# Altium PCB PCB1.PcbDoc
Units mm, origin at the board's own origin, x right, y up, seen from the top; angles counter-clockwise.
Board outline 38 x 38 mm, 2 copper layers (Top Layer, Bottom Layer); 5 components, 6 nets, 25 pads, 0 vias.
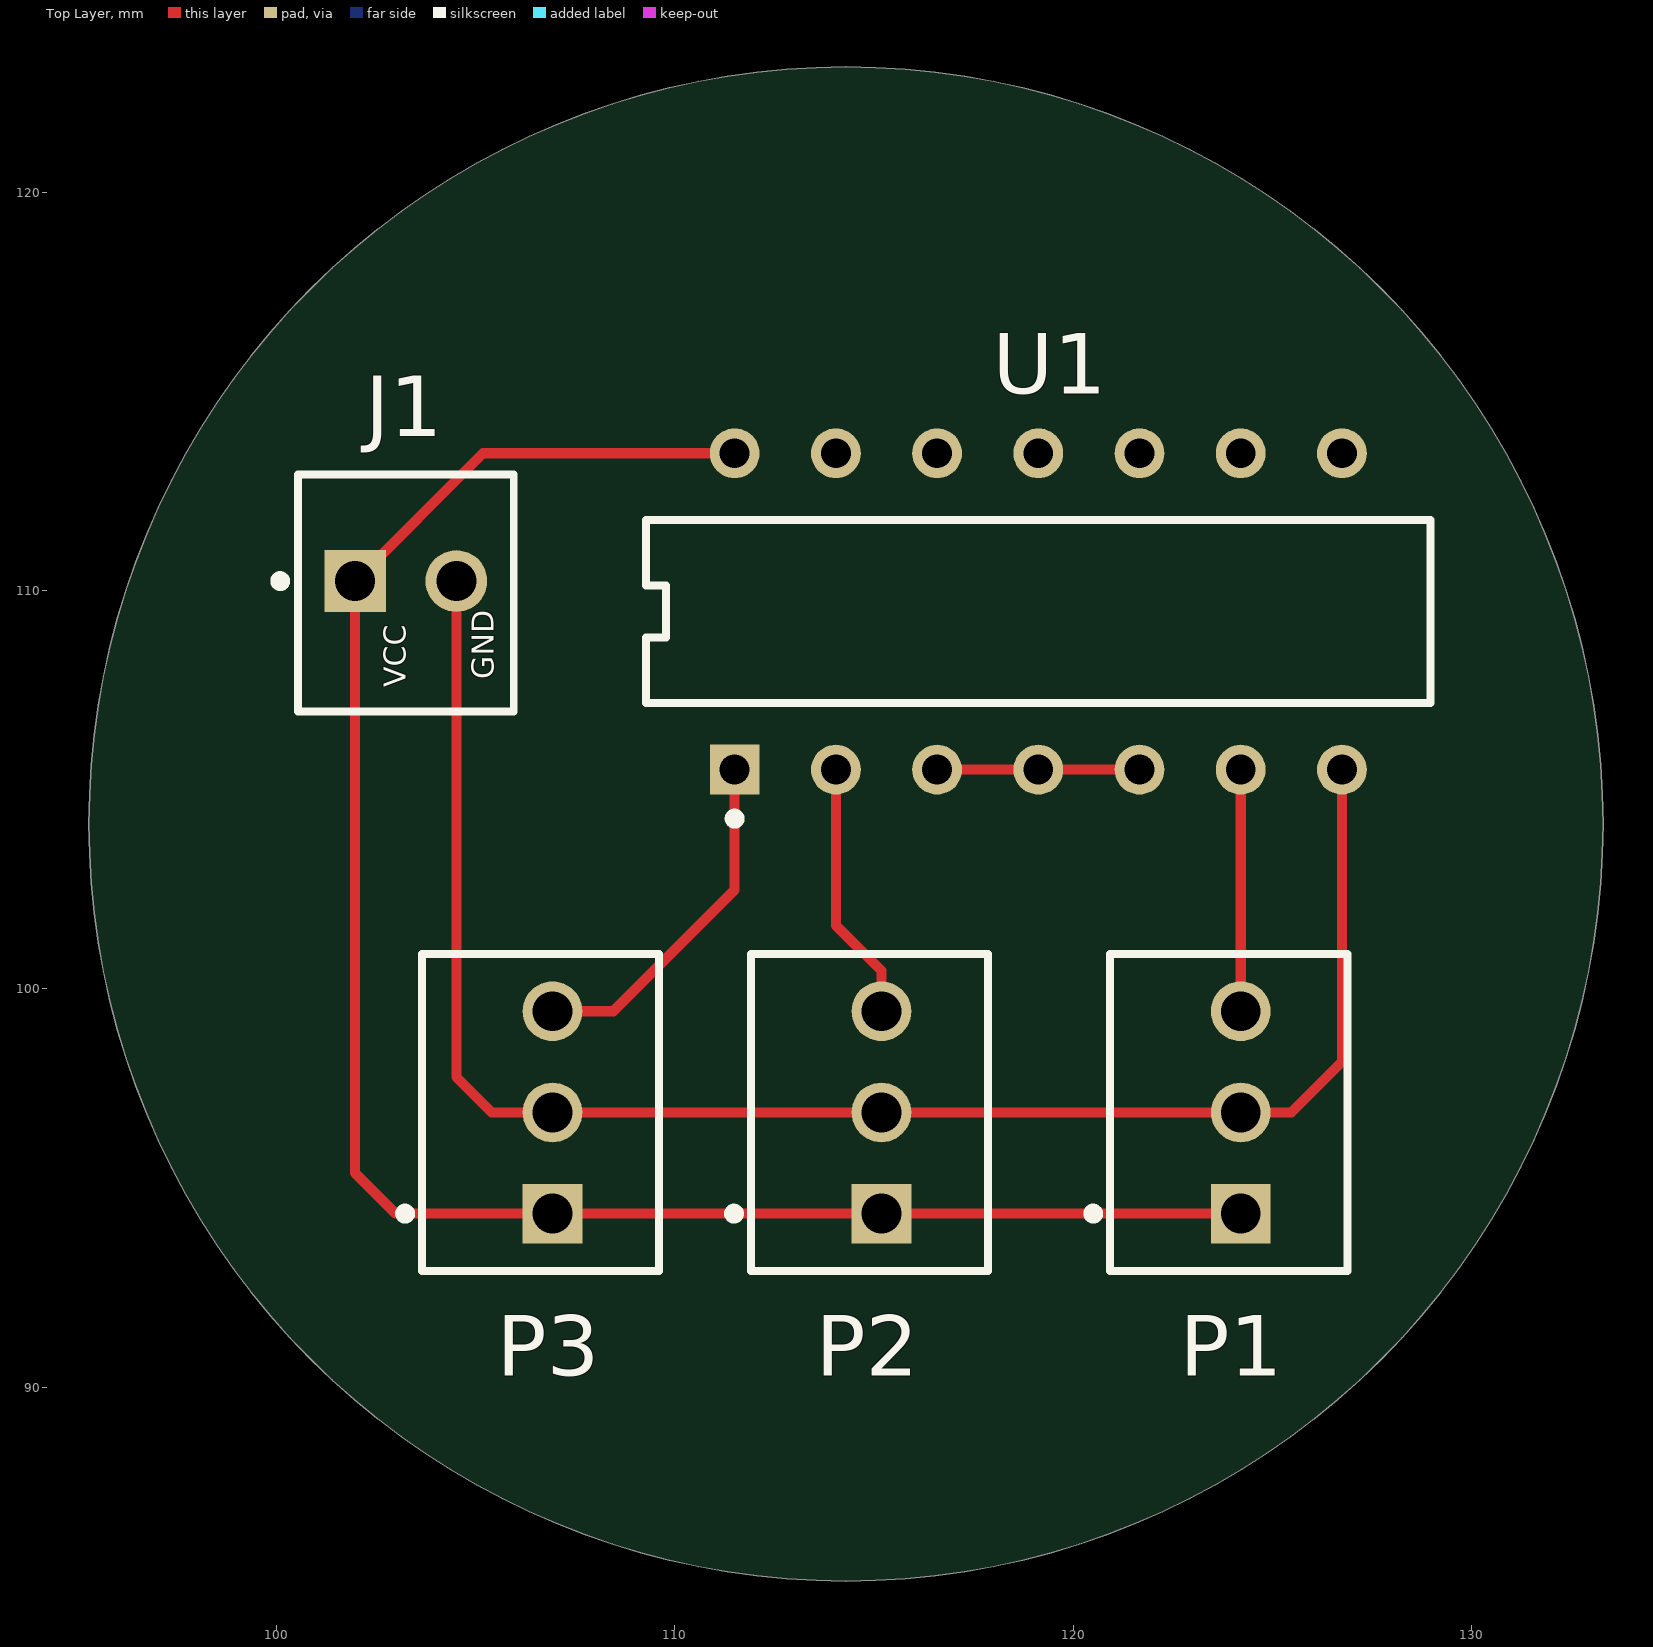
[diagram p0: Top Layer view]
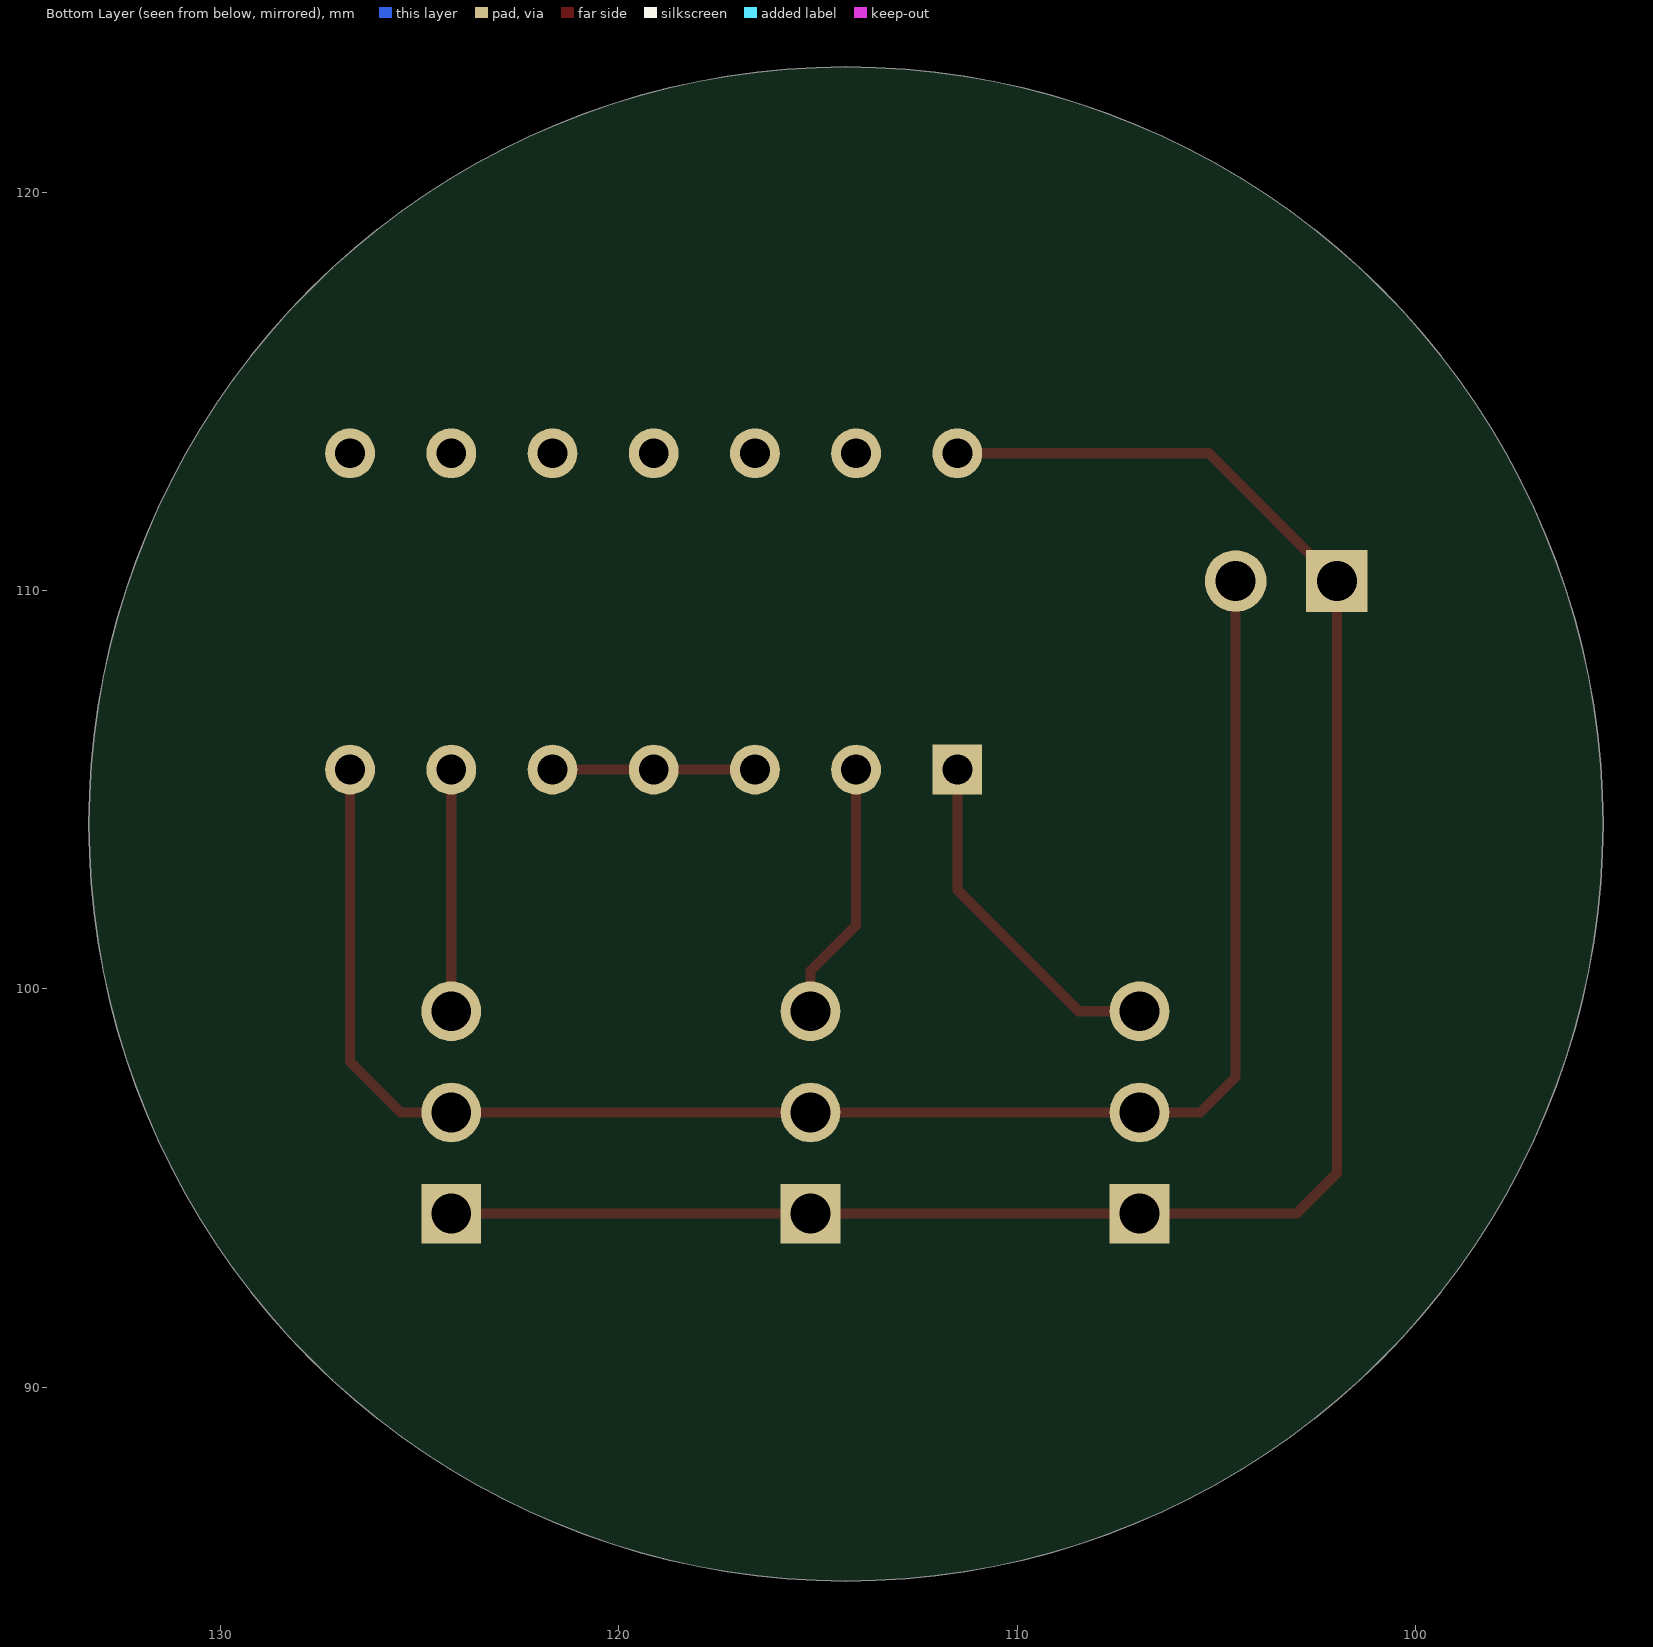
[diagram p1: Bottom Layer view, seen from below]
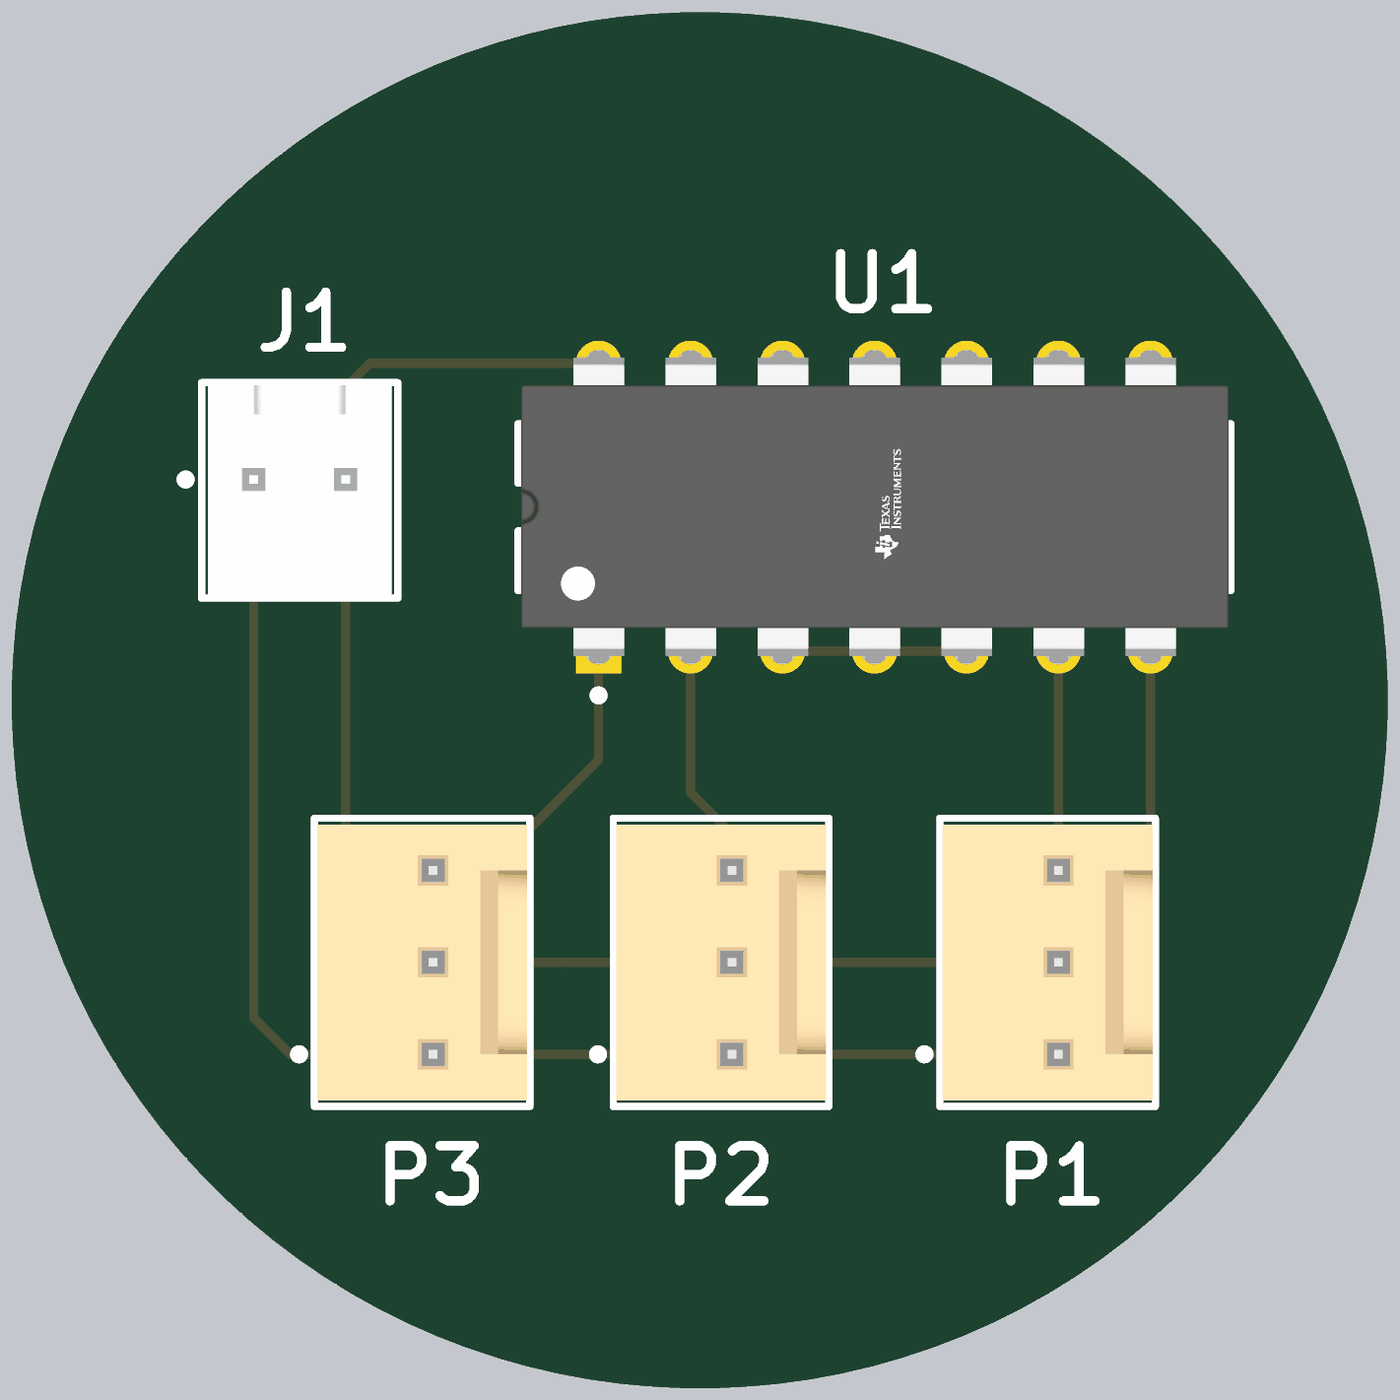
[diagram p2: 3D render of the assembled board from above, using the file's embedded part models]

## Layer stack, top to bottom
Top Solder: solder mask 0.0102, Solder Resist, Dk 3.5
Top Layer: signal copper 0.0356
Dielectric 1: dielectric 0.32, FR-4, Dk 4.8
Bottom Layer: signal copper 0.0356
Bottom Solder: solder mask 0.0102, Solder Resist, Dk 3.5

## Board outline
95.3,104.14 ccw(c114.3,104.14) 114.3,85.14 ccw(c114.3,104.14) 133.3,104.14 ccw(c114.3,104.14) 114.3,123.14 ccw(c114.3,104.14)

## Design rules (kind name [scope] priority, off if disabled: settings)
Clearance [All] p1: gap=0.254 ignorepadtopadclearanceinfootprint=FALSE except(0: Arc-Hole Track-Hole SMDPad-Hole THPad-Hole Via-Hole Fill-Hole Poly-Hole Region-Hole Text-Hole)
PolygonConnect [All] p1: connectstyle=Relief reliefconductorwidth=0.254 reliefentries=4 polygonreliefangle="90 Angle" airgapwidth=0.254
RoutingVias [All] p1: holewidth=0.711 width=1.27 viastyle="Through Hole" minholewidth=0.711 minwidth=1.27 maxholewidth=0.711 maxwidth=1.27
SolderMaskExpansion [All] p1: expansion=0.102 istentingtop=FALSE
Width [All] p1: maxlimit=0.254 minlimit=0.254 preferedwidth=0.254
30 further rules are at their usual default settings.

## Components (designator, comment, footprint, x,y, rotation, side; value= is the part's Value field where it differs from the comment)
J1 "61900211121" FP-61900211121-MFG 103.251,109.936 r0 top
P1 "RELAY" 61900311121 123.906,96.901 r270 top
P2 "PIR" 61900311121 114.889,96.901 r270 top
P3 "LDR" 61900311121 106.634,96.901 r270 top
U1 "SN74HC00N" FP-N0014A-MFG 119.126,109.474 r90 top

## Footprints (in the part's own frame and the unit in brackets; to place one, negate y for a bottom-side part, rotate by r counter-clockwise, add the part's x,y. Pads: shape width x height; smd on the part's side, far side on the other; paste and mask are expansions set on the pad)
61900311121 [mm] "2.54mm Male Locking Header, 3p"
  rect 1.5x1.5 hole 1: 1(2.54,0.3)
  round 1.5 hole 1: 2(0,0.3) 3(-2.54,0.3)
  silkscreen extent -3.98,-3.52 3.98,2.98, body extent -3.81,-2.9 3.81,2.9, height 11.53
FP-61900211121-MFG [mm]
  rect 1.55x1.55 hole 1 paste-1000 mask+0: 1(-1.27,0.3)
  round 1.55 hole 1 paste-1000 mask+0: 2(1.27,0.3)
  silkscreen extent -3.27,-2.98 2.71,2.98, body extent -2.81,-3.08 2.81,3.08, height 0.25
FP-N0014A-MFG [mm]
  rect 1.25x1.25 hole 0.75 paste-1000 mask+0: 1(-3.97,7.62)
  round 1.25 hole 0.75 paste-1000 mask+0: 2(-3.97,5.08) 3(-3.97,2.54) 4(-3.97,0) 5(-3.97,-2.54) 6(-3.97,-5.08) 7(-3.97,-7.62) 8(3.97,-7.62) 9(3.97,-5.08) 10(3.97,-2.54) 11(3.97,0) 12(3.97,2.54) 13(3.97,5.08) 14(3.97,7.62)
  silkscreen extent -5.32,-9.84 2.3,9.84, body extent -4.69,-9.94 4.69,9.94, height 0.25

## Part data
J1: library part CMP-1502-00584-2, "CONN HEADER VERT 2POS 2.54MM", Color=Beige, Current Rating=3A, Flammability Rating="UL94 V-0", Insulation Resistance=1GR, Max Operating Temperature=105°C, Min Operating Temperature=-40°C, Package Quantity=1000, Voltage Rating=250V, Connector Type=Header, Contact Finish - Mating=TIN, Contact Gender=Male, Contact Material="Copper Alloy", Contact Mating Length=0.295inch, Contact Plating=Tin, Contact Shape=Square, Contact Type="Male Pin", Fastening Type=Friction, Gender=Male, Height=14.2mm, Housing Material=Nylon, Insulation Color=Beige, Insulation Material=Nylon, Length=5.8mm, Mount="Through Hole", Number of Contacts=2, Number of Positions=2, Number of Rows=1, Packaging=Bulk, Pitch=2.54mm, RoHS Compliant=Yes, Series=WR-WTB, Termination="Through Hole", Width=5.12mm
P1 P2 P3: library part CMP-1502-00585-1, "Male Locking Header WR-WTB, THT, Vertical, pitch 2.54 mm, 1 x 3 position", Contact Resistance=20mOhm, Manufacturer="Wurth Elektronik", Operating Temperature=-40to105degC, Package Reference=61900311121, Working Voltage=250VAC, Datasheet URL=https://katalog.we-online.de/em/datasheet/6190xx11121.pdf, Gender=Male, Manufacturer URL=http://www.we-online.de, Mounting Technology=THT, Orientation=Vertical, Packaging=Bag, Part Number=61900311121, Pitch=2.54mm, Position=1x3, Publisher=WurthElektronik
U1: library part CMP-1627-00482-3, "IC GATE NAND 4CH 2-INP 14DIP", Case/Package=PDIP, High Level Output Current=-5.2mA, Low Level Output Current=5.2mA, Max Operating Temperature=85°C, Max Output Current=4mA, Max Supply Voltage=6V, Min Operating Temperature=-40°C, Min Supply Voltage=2V, Operating Supply Voltage=5V, Package Quantity=25, Quiescent Current=2uA, Contact Plating=Gold, Height=4.57mm, Lead Free="Lead Free", Length=19.3mm, Logic Function=NAND, Mount="Through Hole", Number of Bits=4, Number of Circuits=4, Number of Elements=4, Number of Gates=4, Number of Input Lines=2, Number of Inputs=2, Number of Output Lines=1, Number of Outputs=1, Number of Pins=14, Output Current=5.2mA, Packaging=Rail/Tube, Propagation Delay=15ns, Radiation Hardening=No, REACH SVHC="No SVHC", Schmitt Trigger Input=No, Turn-On Delay Time=20ns, Weight=0.032734oz, Width=6.35mm

## Nets (pads, with @x,y where several pads share a name; then routed paths per layer and width w, separated by ;. In a path a pad name is that pad's centre, name@x,y a point inside that pad or via, vN(x,y) a via of type N, cw(c..) or ccw(c..) an arc to the next point about the centre after c; other vN are vias at no path point)
NetJ1_1: J1.1 P1.1 P2.1 P3.1 U1.14 | length 48.4
  Top Layer w0.254: U1.14 105.189,113.444 J1.1 101.981,95.377 102.997,94.361 P3.1 P2.1 P1.1
NetJ1_2: J1.2 P1.2 P2.2 P3.2 U1.7 | length 42.9
  Top Layer w0.254: J1.2 104.521,97.79 105.41,96.901 P2.2 125.476,96.901 126.746,98.171 U1.7
NetP1_3: P1.3 U1.6 | length 6.1
  Top Layer w0.254: P1.3 U1.6
NetP2_3: P2.3 U1.2 | length 6.5
  Top Layer w0.254: U1.2 114.046,101.6 115.189,100.457 P2.3
NetP3_3: P3.3 U1.1 | length 8.8
  Top Layer w0.254: P3.3 108.458,99.441 111.506,102.489 U1.1
NetU1_3: U1.3 U1.4 U1.5 | length 5.1
  Top Layer w0.254: U1.3 U1.4 U1.5
pads on no net: U1.8 U1.9 U1.10 U1.11 U1.12 U1.13

## Silkscreen, mask and mechanical layers (free items; w line width, h text height)
Top Overlay:
  text "GND" at 105.464,107.769 h0.55 r90
  text "VCC" at 103.251,107.569 h0.55 r90
Mechanical 1:
  circle w0.254: c114.3,104.14 r19